# Allegro board d0308_pcb01gbout.brd
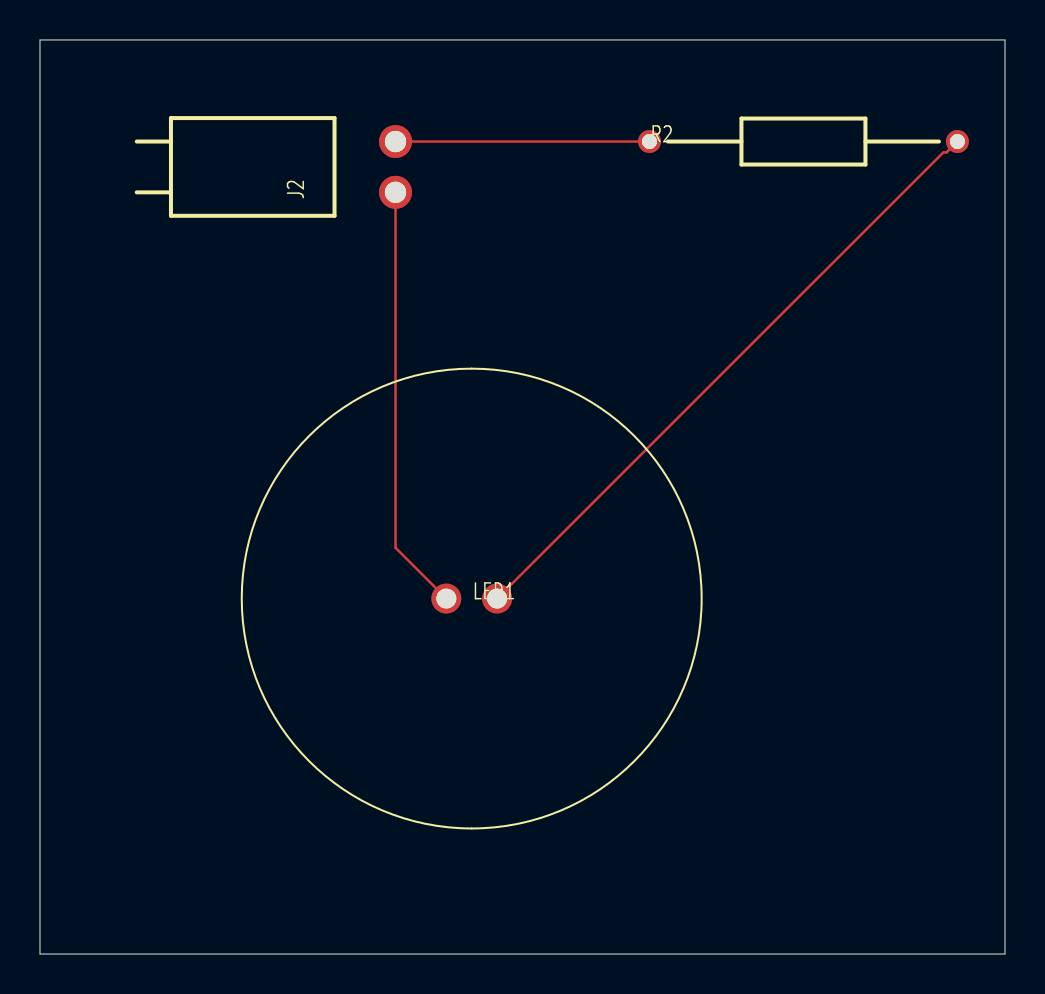
[diagram p0: board, top side]
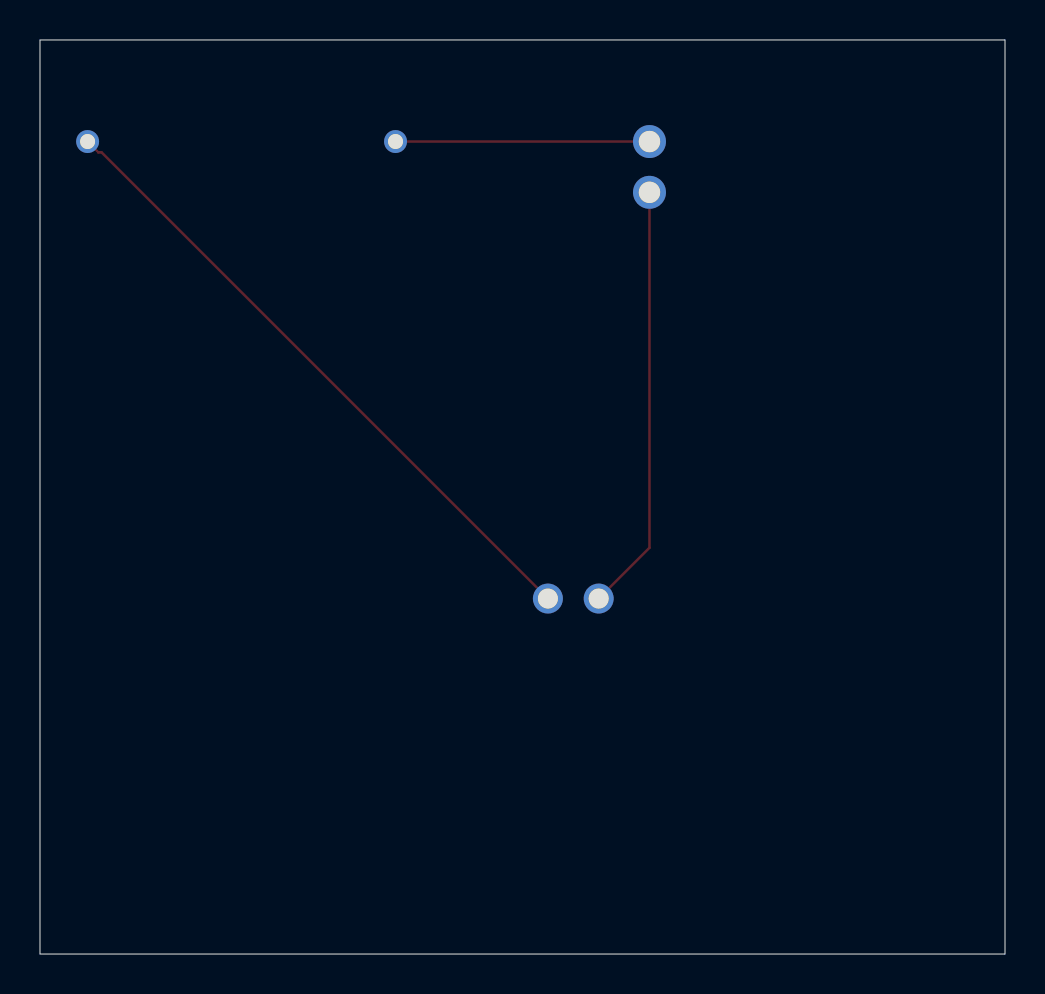
[diagram p1: board, bottom side, seen from below]

Outline 48.26 x 45.72 mm; copper layers: TOP, BOTTOM. Coordinates in mm from the lower left corner of the outline.
Outline path: 0,45.72 0,0 48.26,0 48.26,45.72 0,45.72

## Design rules (mm)
constraint set DEFAULT: min track width 0.127

## Placement (name value [footprint] x y rotation side)
J2  -  [22-05-3021]  17.78 38.1 90 top
LED1  SSL-LX20R6SRD  [SSLLX20R6SRD]  20.32 17.78 0 top
R2  LR1F1K0  [RESAD1540W55L620D230]  30.48 40.64 0 top

## Library data of the parts
J2 = 22-05-3021
LED1 = SSL-LX20R6SRD
R2 = LR1F1K0

## Footprints (pads in the part's own frame, mm; a bottom-side part is the same pattern mirrored in y, then rotated)
22-05-3021
  round 1.65 hole 1.07: 1(0,0) 2(2.54,0)
RESAD1540W55L620D230
  round 1.15 hole 0.75: 1(0,0) 2(15.4,0)
SSLLX20R6SRD
  round 1.5 hole 1: 1(0,0) 2(2.54,0)

## Nets
GND: J2.2 R2.1
N00144: LED1.2(K) R2.2
N00230: J2.1 LED1.1

## Routing (per net, layer and track width the routed paths; a pad name or vN(x,y) marks a point on that pad's centre or on a via; arc(x,y) is an arc through that point)
GND: length 12.7
  TOP w0.127: J2.2 R2.1
N00144: length 32.5
  TOP w0.127: R2.2 45.34,40.1 45.18,40.1 LED1.2
N00230: length 21.4
  TOP w0.127: LED1.1 17.78,20.32 J2.1
